# Altium PCB Pcb1.PcbDoc
Units mm, origin at the board's own origin, x right, y up, seen from the top; angles counter-clockwise.
Board outline 25.4 x 57.15 mm, 4 copper layers (Top Layer 1, Int1 (GND), Int2 (PWR), Bottom Layer 1), stack 2.157 mm thick; 38 components, 25 nets, 120 pads, 0 vias.
Unrouted connection lines stored in the file: 91.
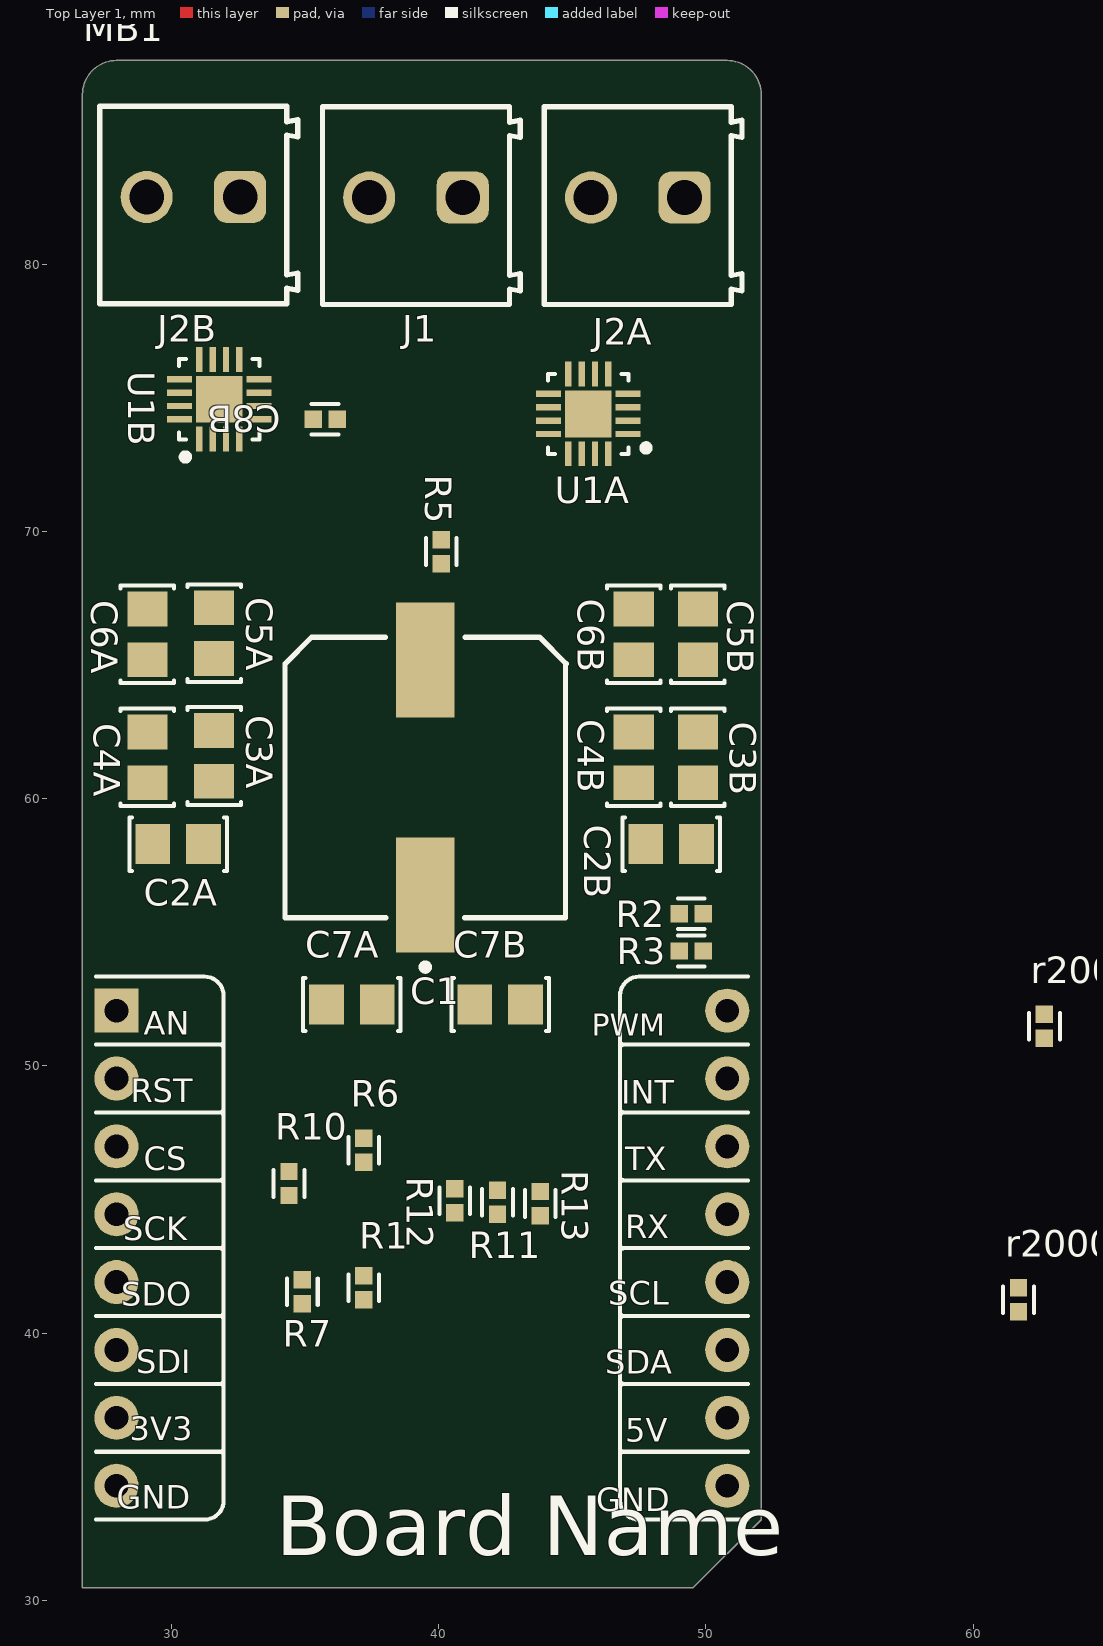
[diagram p0: Top Layer 1 view]
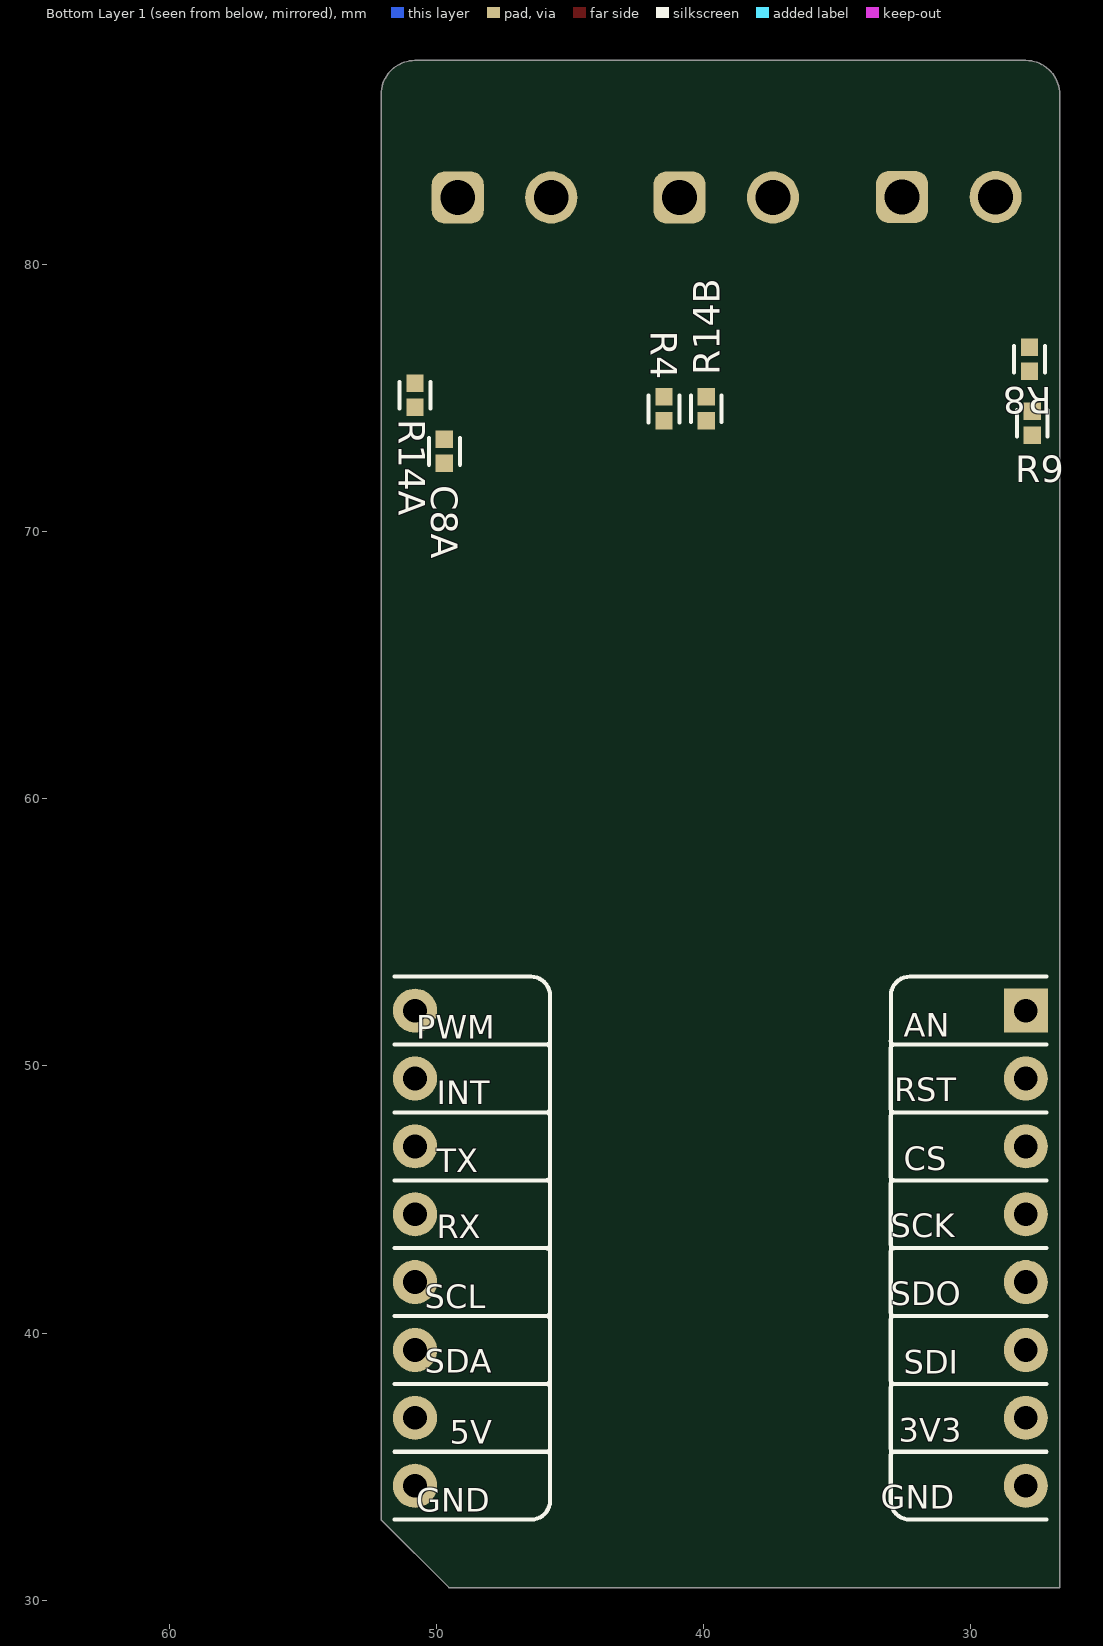
[diagram p1: Bottom Layer 1 view, seen from below]
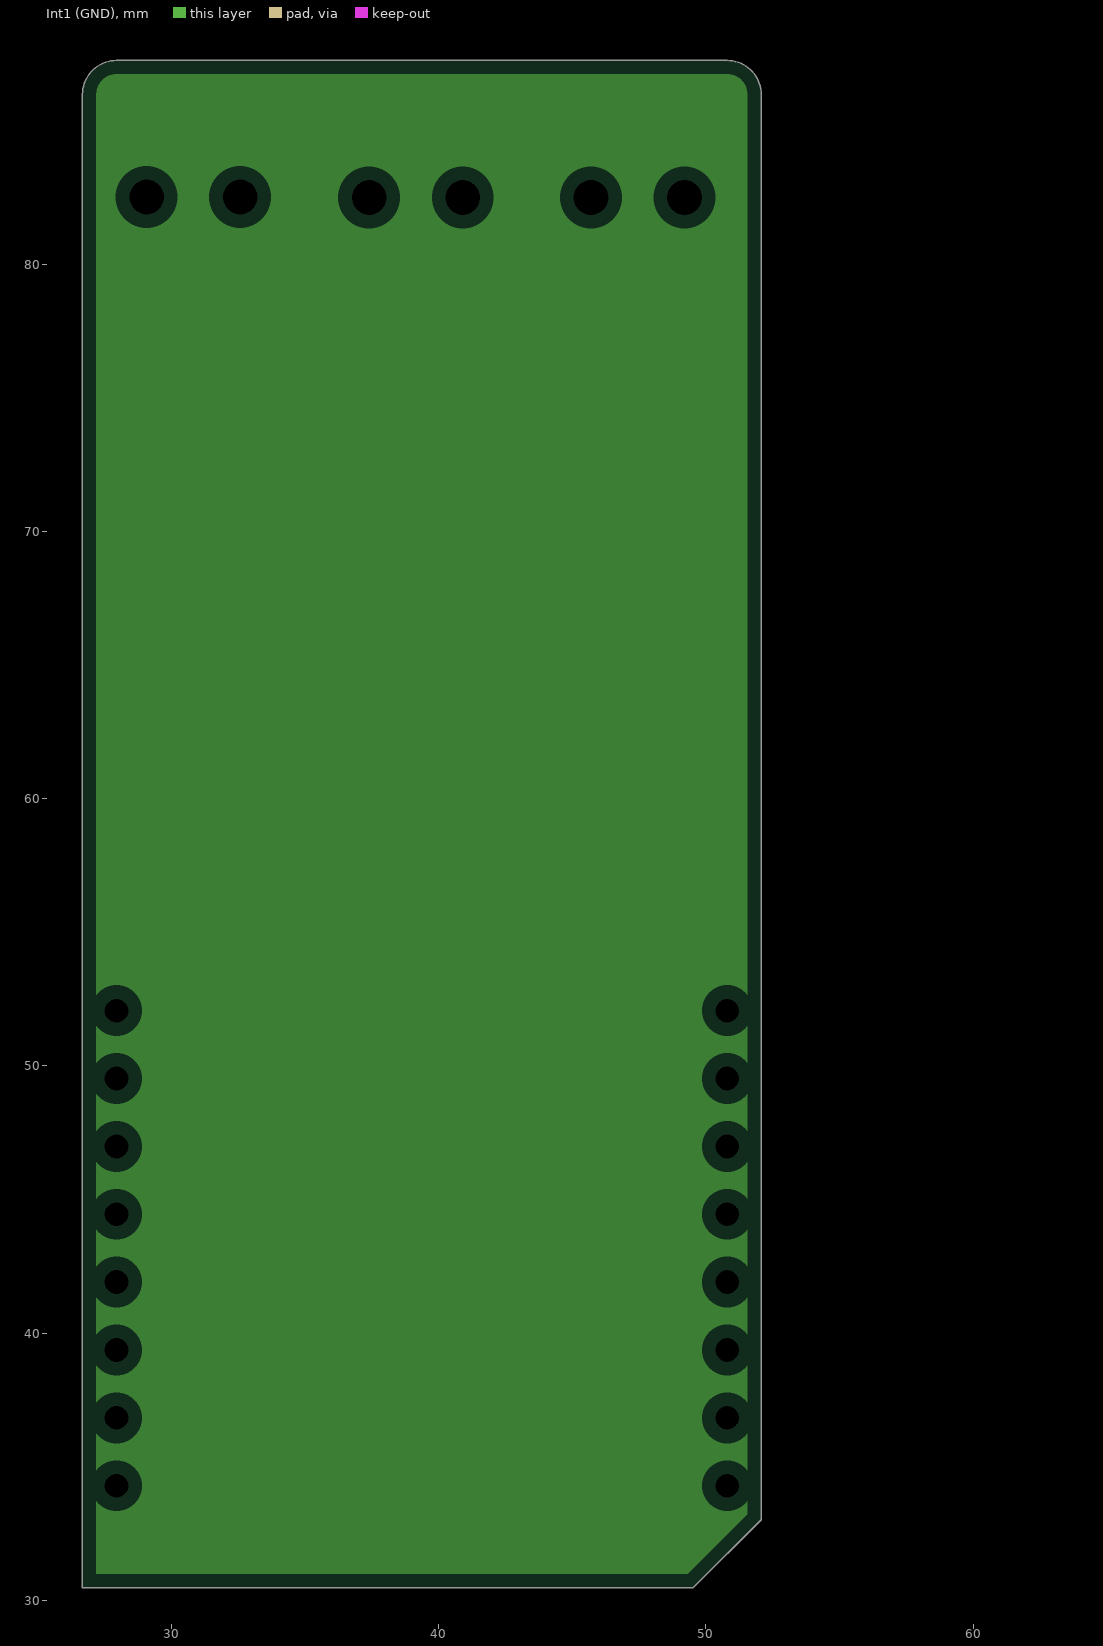
[diagram p2: Int1 (GND), clearances drawn from the general rule]
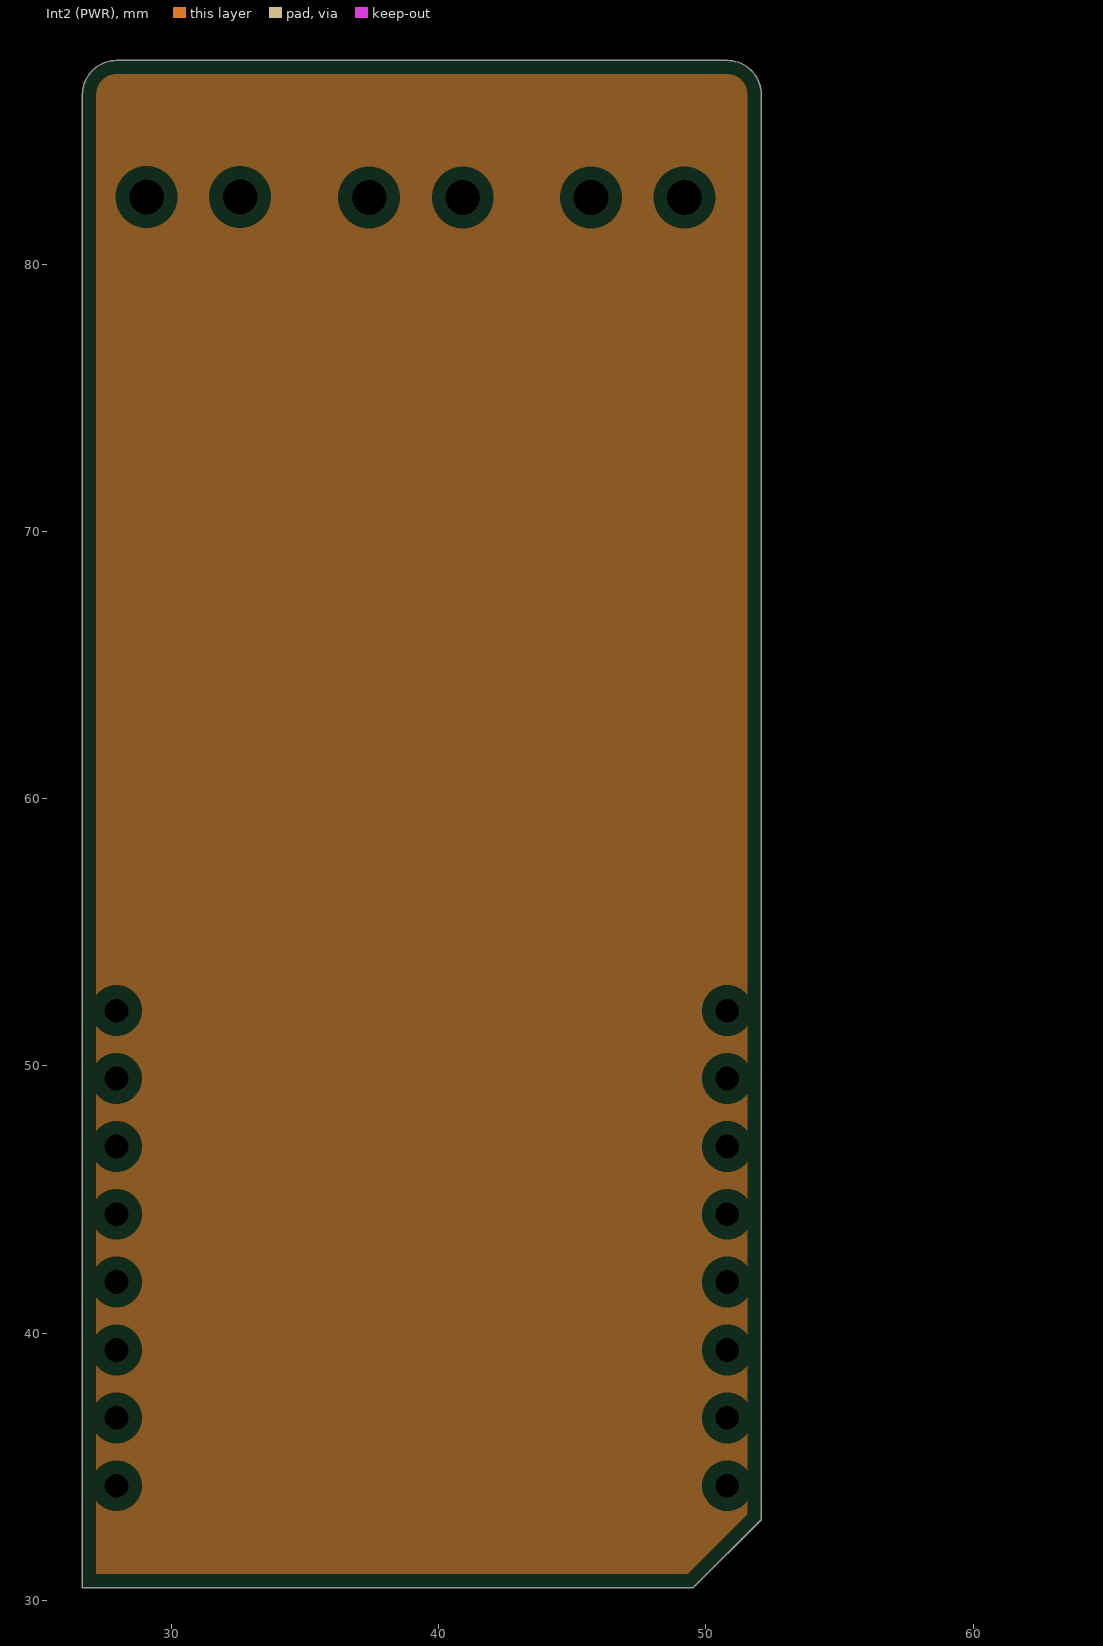
[diagram p3: Int2 (PWR), clearances drawn from the general rule]

## Layer stack, top to bottom
Top Solder: solder mask 0.0254, SM-001, Dk 4
Top Layer 1: signal copper 0.035
Dielectric 1: prepreg 0.1295, PP-017, Dk 4.3
Dielectric 2: prepreg 0.1295, PP-017, Dk 4.3
Int1 (GND): plane copper 0.035
Dielectric 3: core 1.4986, Core-043, Dk 4.3
Int2 (PWR): plane copper 0.035
Dielectric 4: prepreg 0.1295, PP-017, Dk 4.3
Dielectric 5: prepreg 0.1295, PP-017, Dk 4.3
Bottom Layer 1: signal copper 0.035
Bottom Solder: solder mask 0.0254, SM-001, Dk 4

## Board outline
26.67,30.48 26.67,86.36 cw(c27.94,86.36) 27.94,87.63 50.8,87.63 cw(c50.8,86.36) 52.07,86.36 52.07,33.02 49.53,30.48

## Design rules (kind name [scope] priority, off if disabled: settings)
RoomDefinition U_Motor_Drive_B [InComponentClass('U_Motor_Drive_B')] p1: confinementstyle=ConfineIn formatcopy=TRUE lockcomponents=FALSE outline -35.73,-41.41 15.07,-41.41 15.07,-16.01 -35.73,-16.01
RoomDefinition U_Motor_Drive_A [InComponentClass('U_Motor_Drive_A')] p2: confinementstyle=ConfineIn formatcopy=TRUE lockcomponents=FALSE outline -35.73,-41.41 15.07,-41.41 15.07,-16.01 -35.73,-16.01
SupplyNets "Schematic Supply Nets_3" [InNet('GND')] p1: voltage=0.000
SupplyNets "Schematic Supply Nets_2" [InNet('VCC_3.3V')] p2: voltage=0.000
SupplyNets "Schematic Supply Nets_1" [InNet('VM')] p3: voltage=0.000
SupplyNets "Schematic Supply Nets" [InNet('VCC_5V')] p4: voltage=0.000

## Classes and differential pairs
component class U_Motor_Drive_B: C2B C3B C4B C5B C6B C7B C8B J2B R14B r2000B U1B
component class U_Motor_Drive_A: C2A C3A C4A C5A C6A C7A C8A J2A R14A r2000A U1A
channel class Motor_Drive: U_Motor_Drive_A U_Motor_Drive_B
component class U_Interface_Mikrobus: MB1 R10 R11 R12 R13
component class U_Connecteur: C1 J1
component class Page_Tete: R1 R2 R3 R4 R5 R6 R7 R8 R9

## Components (designator, comment, footprint, x,y, rotation, side; value= is the part's Value field where it differs from the comment)
C1 "=Comment" C_EL_D10MM-L11MM 39.5,60.8 r90 top value=100uF
C2A "CAP CER 100nF 50V 0805" C_2012[0805] 30.25,58.3 r180 top value=100nF (schematic designator C2)
C2B "CAP CER 100nF 50V 0805" C_2012[0805] 48.7,58.3 r0 top value=100nF (schematic designator C2)
C3A "CAP CER 10uF 10V X7R 0805" C_2012[0805] 31.6,61.6 r90 top value=10uF (schematic designator C3)
C3B "CAP CER 10uF 10V X7R 0805" C_2012[0805] 49.7,61.55 r90 top value=10uF (schematic designator C3)
C4A "CAP CER 10uF 10V X7R 0805" C_2012[0805] 29.1,61.55 r270 top value=10uF (schematic designator C4)
C4B "CAP CER 10uF 10V X7R 0805" C_2012[0805] 47.3,61.55 r270 top value=10uF (schematic designator C4)
C5A "CAP CER 10uF 10V X7R 0805" C_2012[0805] 31.6,66.2 r270 top value=10uF (schematic designator C5)
C5B "CAP CER 10uF 10V X7R 0805" C_2012[0805] 49.7,66.15 r270 top value=10uF (schematic designator C5)
C6A "CAP CER 10uF 10V X7R 0805" C_2012[0805] 29.1,66.15 r90 top value=10uF (schematic designator C6)
C6B "CAP CER 10uF 10V X7R 0805" C_2012[0805] 47.3,66.15 r90 top value=10uF (schematic designator C6)
C7A "CAP CER 100nF 50V 0805" C_2012[0805] 36.75,52.3 r180 top value=100nF (schematic designator C7)
C7B "CAP CER 100nF 50V 0805" C_2012[0805] 42.3,52.3 r0 top value=100nF (schematic designator C7)
C8A "CAP CER 10nF 50V X7R 0402" C_1005[0402] 49.7,73 r90 bottom value=10nF (schematic designator C8)
C8B "CAP CER 10nF 50V X7R 0402" C_1005[0402] 35.75,74.2 r180 top value=10nF (schematic designator C8)
J1 "DB301V-3.5-2P-GN-S" CONN_TERM_BLOCK_2POS_3mm5 39.15,82.2 r180 top
J2A "DB301V-3.5-2P-GN-S" CONN_TERM_BLOCK_2POS_3mm5 47.45,82.2 r180 top (schematic designator J2)
J2B "DB301V-3.5-2P-GN-S" CONN_TERM_BLOCK_2POS_3mm5 30.821,82.221 r180 top (schematic designator J2)
MB1 "mikroBUS" "mikroBUS - Large" 26.67,30.48 r0 top locked
R1 "Res 2k2 1% 0402" R_1005[0402] 37.2,41.7 r270 top value=DNP
R2 "Res 2k2 1% 0402" R_1005[0402] 49.45,55.7 r180 top value=DNP
R3 "Res 2k2 1% 0402" R_1005[0402] 49.45,54.3 r180 top value=DNP
R4 "Res 2k2 1% 0402" R_1005[0402] 41.479,74.59 r90 bottom value=2k2
R5 "Res 2k2 1% 0402" R_1005[0402] 40.1,69.25 r90 top value=2k2
R6 "Res 2k2 1% 0402" R_1005[0402] 37.2,46.85 r270 top value=DNP
R7 "Res 2k2 1% 0402" R_1005[0402] 34.9,41.55 r270 top value=2k2
R8 "Res 2k2 1% 0402" R_1005[0402] 27.8,76.45 r270 bottom value=2k2
R9 "Res 2k2 1% 0402" R_1005[0402] 27.7,74.05 r90 bottom value=DNP
R10 "Res 10k 1% 0402" R_1005[0402] 34.4,45.6 r270 top value=10k
R11 "Res 2k2 1% 0402" R_1005[0402] 42.2,44.9 r270 top value=2k2
R12 "Res 2k2 1% 0402" R_1005[0402] 40.6,44.95 r270 top value=2k2
R13 "Res 10k 1% 0402" R_1005[0402] 43.8,44.85 r270 top value=10k
R14A "Res 7k5 1% 0402" R_1005[0402] 50.8,75.1 r270 bottom value=7k5 (schematic designator R14)
R14B "Res 7k5 1% 0402" R_1005[0402] 39.9,74.6 r90 bottom value=7k5 (schematic designator R14)
r2000A "Res 2k2 1% 0402" R_1005[0402] 61.7,41.25 r90 top value=DNP (schematic designator r2000)
r2000B "Res 2k2 1% 0402" R_1005[0402] 62.67,51.49 r90 top value=DNP (schematic designator r2000)
U1A "DRV8234RTER" U_WQFN50P300X300-16 45.6,74.4 r180 top (schematic designator U1)
U1B "DRV8234RTER" U_WQFN50P300X300-16 31.791,74.95 r90 top (schematic designator U1)

## Footprints (in the part's own frame and the unit in brackets; to place one, negate y for a bottom-side part, rotate by r counter-clockwise, add the part's x,y. Pads: shape width x height; smd on the part's side, far side on the other; paste and mask are expansions set on the pad)
C_1005[0402] [mm] "Capacitor MLCC; Body 1.1 x 0.5 mm (LxW typ)"
  rect 0.65x0.65 smd mask+0.075: 1(-0.45,0) 2(0.45,0)
  silkscreen extent -0.5,-0.57 0.5,0.58, body extent -0.51,-0.25 0.51,0.25, height 0.51
C_2012[0805] [mm] "Capacitor MLCC; Body 2.0 x 1.3 mm (LxW typ)"
  rect 1.3x1.5 smd: 1(-0.95,0) 2(0.95,0)
  silkscreen extent -1.83,-1 1.83,1, body extent -1,-0.62 1,0.63, height 0.78
C_EL_D10MM-L11MM [mm] "SMD, D10xL10.5mm"
  rect 4.3x2.2 smd paste+0 mask+0: 1(-4.4,0) 2(4.4,0)
  silkscreen extent -7.22,-5.28 5.25,5.25, body extent -6.8,-5.5 6.8,5.5, height 0.25
CONN_TERM_BLOCK_2POS_3mm5 [mm] "3.50 mm Horizontal Entry Modular, 2p"
  rrect50% 1.95x1.95 hole 1.3: 1(-1.75,-0.3)
  round 1.95 hole 1.3: 2(1.75,-0.3)
  silkscreen extent -3.9,-3.7 3.5,3.7, body extent -3.95,-3.7 3.5,3.7, height 8.55
"mikroBUS - Large" [mil]
  rect 65x65 hole 35: 1(50,850)
  round 65 hole 35: 2(50,750) 3(50,650) 4(50,550) 5(50,450) 6(50,350) 7(50,250) 8(50,150) 9(950,150) 10(950,250) 11(950,350) 12(950,450) 13(950,550) 14(950,650) 15(950,750) 16(950,850)
  silkscreen extent 20,100 980,900, body extent -5,100 1010,900, height 82
R_1005[0402] [mm] "Chip Resistor; Body 1.1 x 0.5 mm (LxW typ)"
  rect 0.65x0.65 smd mask+0.075: 1(-0.45,0) 2(0.45,0)
  silkscreen extent -0.5,-0.57 0.5,0.58, body extent -0.5,-0.25 0.5,0.26, height 0.36
U_WQFN50P300X300-16 [mm]
  rect 0.931x0.239 smd paste+0 mask+0: 1(-1.491,0.75) 2(-1.491,0.25) 3(-1.491,-0.25) 4(-1.491,-0.75) 9(1.491,-0.75) 10(1.491,-0.25) 11(1.491,0.25) 12(1.491,0.75)
  rect 0.239x0.931 smd paste+0 mask+0: 5(-0.75,-1.491) 6(-0.25,-1.491) 7(0.25,-1.491) 8(0.75,-1.491) 13(0.75,1.491) 14(0.25,1.491) 15(-0.25,1.491) 16(-0.75,1.491)
  rect 1.75x1.75 smd paste-0.862 mask+0: 17(0,0)
  silkscreen extent -2.28,-1.5 1.5,1.5, body extent -1.5,-1.5 1.5,1.5, height 0.8

## Part data
C1: library part capacitor_EL, "Capacitor type EL"
C2A C2B C7A C7B: library part CAP008, "Capacitor type 1", Dielectric=X7R, Manufacturer 1=Yageo, Manufacturer Part Number 1=CC0805KRX7R9BB104, Rated Voltage=50V, Supplier Part Number 1=C49678, Tolerance=10%, Code CEGEP=KCOND0142SM, LibRef=CAP008, Mounting Technology=SMT, Supplier 1=LCSC
C3A C3B C4A C4B C5A C5B C6A C6B: library part CAP004, "Capacitor type 1", Dielectric=X7R, Manufacturer 1=muRata, Manufacturer Part Number 1=GRM21BR71A106KE51L, Rated Voltage=10V, Supplier Part Number 1=C86038, Tolerance=10%, Code CEGEP=KCOND03SM, LibRef=CAP004, Mounting Technology=SMT, Supplier 1=LCSC
C8A C8B: library part CAP017, "Capacitor type 1", Dielectric=X7R, Manufacturer 1=Yageo, Manufacturer Part Number 1=CC0402KRX7R9BB103, Rated Voltage=50V, Supplier Part Number 1=C60133, Tolerance=10%, LibRef=CAP017, Mounting Technology=SMT, Supplier 1=LCSC
J1 J2A J2B: library part CONN-3MM5-2POS-TERM-BLOCK, "CONN TERM BLOCK 2POS 3.5mm pitch", Manufacturer 1=Dorabo, Supplier Part Number 1=C695629, Manufacturer Part Number 1=DB301V-3.5-2P-GN-S, Mounting Technology=TH, Supplier 1=LCSC
MB1: library part "mikroBUS compatible add-on board", "mikroBUS compatible add-on board"
R1 R2 R3 R4 R5 R6 R7 R8 R9 R11 R12 r2000A r2000B: library part RES008, "Resistor type 1", Manufacturer 1=Yageo, Manufacturer Part Number 1=RC0402FR-072K2L, Max Working Voltage=50V, Supplier Part Number 1=C114762, Tolerance=1%, Code CEGEP=RES2.2KSM, LibRef=RES008, Mounting Technology=SMT, Puissance=1/16W, Supplier 1=LCSC, Supplier 2=Digi-Key, Supplier Part Number 2=311-2.20KLRCT-ND
R10 R13: library part RES003, "Resistor type 1", Manufacturer 1=Yageo, Manufacturer Part Number 1=RC0402FR-0710KL, Max Working Voltage=50V, Supplier Part Number 1=C60490, Tolerance=1%, LibRef=RES003, Mounting Technology=SMT, Puissance=1/16W, Supplier 1=LCSC
R14A R14B: library part RES027, "Resistor type 1", Manufacturer 1=Yageo, Manufacturer Part Number 1=RC0402FR-077k5L, Max Working Voltage=50V, Supplier Part Number 1=C137934, Tolerance=1%, LibRef=RES027, Mounting Technology=SMT, Puissance=1/16W, Supplier 1=LCSC
U1A U1B: library part U_DRV8234, "Brushed DC H-bridge Motor Driver with Ripple Counting, Stall Detection, and Speed Regulation 38V 2A 16-WQFN", Manufacturer 1="Texas Instruments", Manufacturer Part Number 1=DRV8234RTER, Mounting Technology=SMT, Supplier 1=LCSC

## Nets (pads, with @x,y where several pads share a name; then routed paths per layer and width w, separated by ;. In a path a pad name is that pad's centre, name@x,y a point inside that pad or via, vN(x,y) a via of type N, cw(c..) or ccw(c..) an arc to the next point about the centre after c; other vN are vias at no path point)
GND: C1.1 C2A.1 C2B.1 C3A.1 C3B.1 C4A.2 C4B.2 C5A.1 C5B.1 C6A.2 C6B.2 C7A.1 C7B.1 C8A.1 C8B.1 J1.1 MB1.8 MB1.9 R4.1 R5.1 R8.1 R9.1 R14A.1 R14B.1 r2000A.1 r2000B.1 U1A.2 U1A.7 U1A.16 U1A.17 U1B.2 U1B.7 U1B.16 U1B.17
NetC8A_2: C8A.2 MB1.1 R14A.2 U1A.1
NetC8B_2: C8B.2 R14B.2 U1B.1
NetMB1_2: MB1.2 U1A.11
NetMB1_3: MB1.3 R10.1 U1A.3
NetMB1_6: MB1.6 U1A.12
NetMB1_11: MB1.11 R12.1 U1A.14 U1B.14
NetMB1_12: MB1.12 R11.1 U1A.15 U1B.15
NetMB1_15: MB1.15 R13.1 U1A.4 U1B.4
NetMB1_16: MB1.16 U1A.13
NetR1_1: R1.1 U1B.11
NetR2_1: R2.1 R4.2 U1A.9
NetR3_1: R3.1 R5.2 U1A.10
NetR6_1: R6.1 R8.2 U1B.9
NetR7_1: R7.1 R9.2 U1B.10
NetU1B_3: U1B.3
NetU1B_12: U1B.12
NetU1B_13: U1B.13
OUT1A: J2A.1 U1A.6
OUT1B: J2B.1 U1B.6
OUT2A: J2A.2 U1A.8
OUT2B: J2B.2 U1B.8
VCC_3.3V: C7A.2 C7B.2 MB1.7 R1.2 R2.2 R3.2 R6.2 R7.2 R10.2 R11.2 R12.2 R13.2 r2000A.2 r2000B.2
VCC_5V: MB1.10
VM: C1.2 C2A.2 C2B.2 C3A.2 C3B.2 C4A.1 C4B.1 C5A.2 C5B.2 C6A.1 C6B.1 J1.2 U1A.5 U1B.5
pads on no net: MB1.4 MB1.5 MB1.13 MB1.14

## Polygon pours and split planes (outlines as drawn)
no net on Int1 (GND) (split plane): 50.919,87.112 51.035,87.085 51.146,87.039 51.248,86.976 51.339,86.899 51.416,86.808 51.479,86.706 51.525,86.595 51.552,86.479 51.561,86.373 51.56,86.36 51.56,33.231 49.319,30.99 27.18,30.99 27.18,86.36 27.179,86.373 27.188,86.479 27.215,86.595 27.261,86.706 27.324,86.808 27.401,86.899 27.492,86.976 27.594,87.039 27.705,87.085 27.821,87.112 27.927,87.121 27.94,87.12 50.8,87.12 50.813,87.121
no net on Int2 (PWR) (split plane): 50.919,87.112 51.035,87.085 51.146,87.039 51.248,86.976 51.339,86.899 51.416,86.808 51.479,86.706 51.525,86.595 51.552,86.479 51.561,86.373 51.56,86.36 51.56,33.231 49.319,30.99 27.18,30.99 27.18,86.36 27.179,86.373 27.188,86.479 27.215,86.595 27.261,86.706 27.324,86.808 27.401,86.899 27.492,86.976 27.594,87.039 27.705,87.085 27.821,87.112 27.927,87.121 27.94,87.12 50.8,87.12 50.813,87.121

## Silkscreen, mask and mechanical layers (free items; w line width, h text height)
Top Overlay:
  drawing of 18 lines, arcs and shapes, not listed
  text ".NomDeProjet" at 1.741,7.367 h1.5
  text ".Revision" at 1.741,6.1 h1.5
  text ".Print_Date" at 1.739,4.102 h1.5
  text ".NomDeLetudiant" at 1.5,3.015 h1.5
Board:
  the board outline again, w0.254
Drill Drawing:
  circle w0.254: c113.829,64.562 r0.69
  lines w0.25: 111.494,80.03 117.77,80.03 133.779,80.03 142.736,80.03 149.858,80.03 ; 111.494,83.03 117.77,83.03 133.779,83.03 142.736,83.03 149.858,83.03 ; 111.494,86.03 117.77,86.03 133.779,86.03 142.736,86.03 149.858,86.03 ; 111.494,89.03 117.77,89.03 133.779,89.03 142.736,89.03 149.858,89.03 ; 111.494,92.03 117.77,92.03 133.779,92.03 142.736,92.03 149.858,92.03 ; 111.494,95.03 117.77,95.03 133.779,95.03 142.736,95.03 149.858,95.03 ; 111.494,98.03 117.77,98.03 133.779,98.03 142.736,98.03 149.858,98.03 ; 111.494,101.03 117.77,101.03 133.779,101.03 142.736,101.03 149.858,101.03 ; 111.494,104.03 117.77,104.03 133.779,104.03 142.736,104.03 149.858,104.03 ; 111.494,107.03 117.77,107.03 133.779,107.03 142.736,107.03 149.858,107.03 ; 111.494,110.03 117.77,110.03 133.779,110.03 142.736,110.03 149.858,110.03 ; 111.494,113.03 117.77,113.03 133.779,113.03 142.736,113.03 149.858,113.03 ; 111.494,116.03 117.77,116.03 133.779,116.03 142.736,116.03 149.858,116.03 ; 111.494,119.03 117.77,119.03 133.779,119.03 142.736,119.03 149.858,119.03 ; 111.494,122.03 149.858,122.03 ; 111.887,62.942 202.645,62.942 ; 111.887,69.148 202.645,69.148 ; 117.77,125.03 117.77,77.03 ; 119.869,59.839 119.869,72.251 ; 126.446,59.839 126.446,72.251 ; 133.779,125.03 133.779,77.03 ; 140.135,59.839 140.135,72.251 ; 142.736,125.03 142.736,77.03 ; 146.324,59.839 146.324,72.251 ; 155.335,59.839 155.335,72.251 ; 174.37,59.839 174.37,72.251 ; 181.754,59.839 181.754,72.251 ; 191.401,59.839 191.401,72.251 ; 117.77,77.03 133.779,77.03 ; 117.77,77.03 111.494,77.03 111.494,125.03 149.858,125.03 149.858,77.03 142.736,77.03 ; 133.779,77.03 142.736,77.03 ; 111.887,59.839 202.645,59.839 202.645,72.251 111.887,72.251 111.887,59.839
  lines w0.254: 113.139,66.976 114.518,66.976 114.518,68.355 113.139,68.355 113.139,66.976
  text "Layer" at 112.994,122.78 h1.5
  text "Name" at 119.27,122.78 h1.5
  text "Thickness" at 135.279,122.78 h1.5
  text "Gerber" at 144.236,122.78 h1.5
  text "Top Overlay" at 119.27,119.78 h1.5
  text "GTO" at 144.236,119.78 h1.5
  text "Top Solder" at 119.27,116.78 h1.5
  text "0,025mm" at 135.279,116.78 h1.5
  text "GTS" at 144.236,116.78 h1.5
  text "Top Surface Finish" at 119.27,113.78 h1.5
  text "0,020mm" at 135.279,113.78 h1.5
  text "1" at 112.994,110.78 h1.5
  text "Top Layer 1" at 119.27,110.78 h1.5
  text "0,035mm" at 135.279,110.78 h1.5
  text "GTL" at 144.236,110.78 h1.5
  text "Dielectric 1" at 119.27,107.78 h1.5
  text "0,130mm" at 135.279,107.78 h1.5
  text "Dielectric 2" at 119.27,104.78 h1.5
  text "0,130mm" at 135.279,104.78 h1.5
  text "2" at 112.993,101.78 h1.5
  text "Int1 (GND)" at 119.27,101.78 h1.5
  text "0,035mm" at 135.279,101.78 h1.5
  text "GP1" at 144.236,101.78 h1.5
  text "Dielectric 3" at 119.27,98.78 h1.5
  text "1,499mm" at 135.279,98.78 h1.5
  text "3" at 112.994,95.78 h1.5
  text "Int2 (PWR)" at 119.27,95.78 h1.5
  text "0,035mm" at 135.279,95.78 h1.5
  text "GP2" at 144.236,95.78 h1.5
  text "Dielectric 4" at 119.27,92.78 h1.5
  text "0,130mm" at 135.279,92.78 h1.5
  text "Dielectric 5" at 119.27,89.78 h1.5
  text "0,130mm" at 135.279,89.78 h1.5
  text "4" at 112.994,86.78 h1.5
  text "Bottom Layer 1" at 119.27,86.78 h1.5
  text "0,035mm" at 135.279,86.78 h1.5
  text "GBL" at 144.236,86.78 h1.5
  text "Bottom Surface Finish" at 119.27,83.78 h1.5
  text "0,020mm" at 135.279,83.78 h1.5
  text "Bottom Solder" at 119.27,80.78 h1.5
  text "0,025mm" at 135.279,80.78 h1.5
  text "GBS" at 144.236,80.78 h1.5
  text "Bottom Overlay" at 119.27,77.78 h1.5
  text "GBO" at 144.236,77.78 h1.5
  text "Total board thickness:" at 112.994,74.78 h1.5
  text "2,248mm" at 135.277,74.78 h1.5
  text "Symbol" at 113.749,70.079 h1.8
  text "Count" at 120.8,70.079 h1.8
  text "Hole Size" at 127.377,70.079 h1.8
  text "Plated" at 141.066,70.079 h1.8
  text "Hole Type" at 147.255,70.079 h1.8
  text "Drill Layer Pair" at 156.266,70.079 h1.8
  text "Via/Pad" at 175.301,70.079 h1.8
  text "Pad Shape" at 182.685,70.079 h1.8
  text "Hole Length" at 192.332,70.079 h1.8
  text "16" at 120.8,66.976 h1.5
  text "0,889mm (35,00mil)" at 127.377,66.976 h1.5
  text "PTH" at 141.066,66.976 h1.5
  text "Round" at 147.255,66.976 h1.5
  text "Top Layer 1 - Bottom Layer 1" at 156.266,66.976 h1.5
  text "Pad" at 175.301,66.976 h1.5
  text "(Mixed)" at 182.685,66.976 h1.5
  text "-" at 192.332,66.976 h1.5
  text "6" at 120.8,63.873 h1.5
  text "1,300mm (51,18mil)" at 127.377,63.873 h1.5
  text "PTH" at 141.066,63.873 h1.5
  text "Round" at 147.255,63.873 h1.5
  text "Top Layer 1 - Bottom Layer 1" at 156.266,63.873 h1.5
  text "Pad" at 175.301,63.873 h1.5
  text "(Mixed)" at 182.685,63.873 h1.5
  text "-" at 192.332,63.873 h1.5
  text "22 Total" at 120.8,60.77 h1.5

## Text inside footprints (layer, text, board x,y; h text height)
MB1: Top Overlay "Board Name" at 33.909,30.963 h3.81; Top Overlay "PWM" at 45.726,50.855 h1.4; Top Overlay "INT" at 46.829,48.281 h1.5; Top Overlay "TX" at 46.985,45.796 h1.5; Top Overlay "RX" at 46.985,43.256 h1.5; Top Overlay "SCL" at 46.344,40.757 h1.5; Top Overlay "SDA" at 46.228,38.189 h1.5; Top Overlay "5V" at 46.985,35.636 h1.5; Top Overlay "GND" at 45.9,33.033 h1.5; Top Overlay "AN" at 28.956,50.876 h1.5; Top Overlay "GND" at 27.957,33.133 h1.5; Top Overlay "3V3" at 28.432,35.692 h1.5; Top Overlay "SDI" at 28.688,38.207 h1.5; Top Overlay "SDO" at 28.116,40.735 h1.5; Top Overlay "SCK" at 28.194,43.18 h1.5; Top Overlay "CS" at 28.956,45.796 h1.5; Top Overlay "RST" at 28.478,48.336 h1.5; Bottom Overlay "PWM" at 50.749,50.724 h1.5; Bottom Overlay "INT" at 49.987,48.26 h1.5; Bottom Overlay "TX" at 49.987,45.72 h1.5; Bottom Overlay "RX" at 49.987,43.256 h1.5; Bottom Overlay "SCL" at 50.444,40.64 h1.5; Bottom Overlay "SDA" at 50.444,38.227 h1.5; Bottom Overlay "5V" at 49.492,35.56 h1.5; Bottom Overlay "GND" at 50.749,33.02 h1.5; Bottom Overlay "RST" at 32.868,48.387 h1.5; Bottom Overlay "CS" at 32.512,45.796 h1.5; Bottom Overlay "SCK" at 32.993,43.29 h1.5; Bottom Overlay "SDO" at 32.993,40.75 h1.5; Bottom Overlay "SDI" at 32.512,38.176 h1.5; Bottom Overlay "3V3" at 32.704,35.636 h1.5; Bottom Overlay "GND" at 33.376,33.122 h1.5; Bottom Overlay "AN" at 32.512,50.8 h1.5